# Altium PCB Switching_PCb.PcbDoc
Units mm, origin at the board's own origin, x right, y up, seen from the top; angles counter-clockwise.
Board outline 82.44 x 84.62 mm, 2 copper layers (Top Layer, Bottom Layer); 19 components, 84 nets, 304 pads, 104 vias.
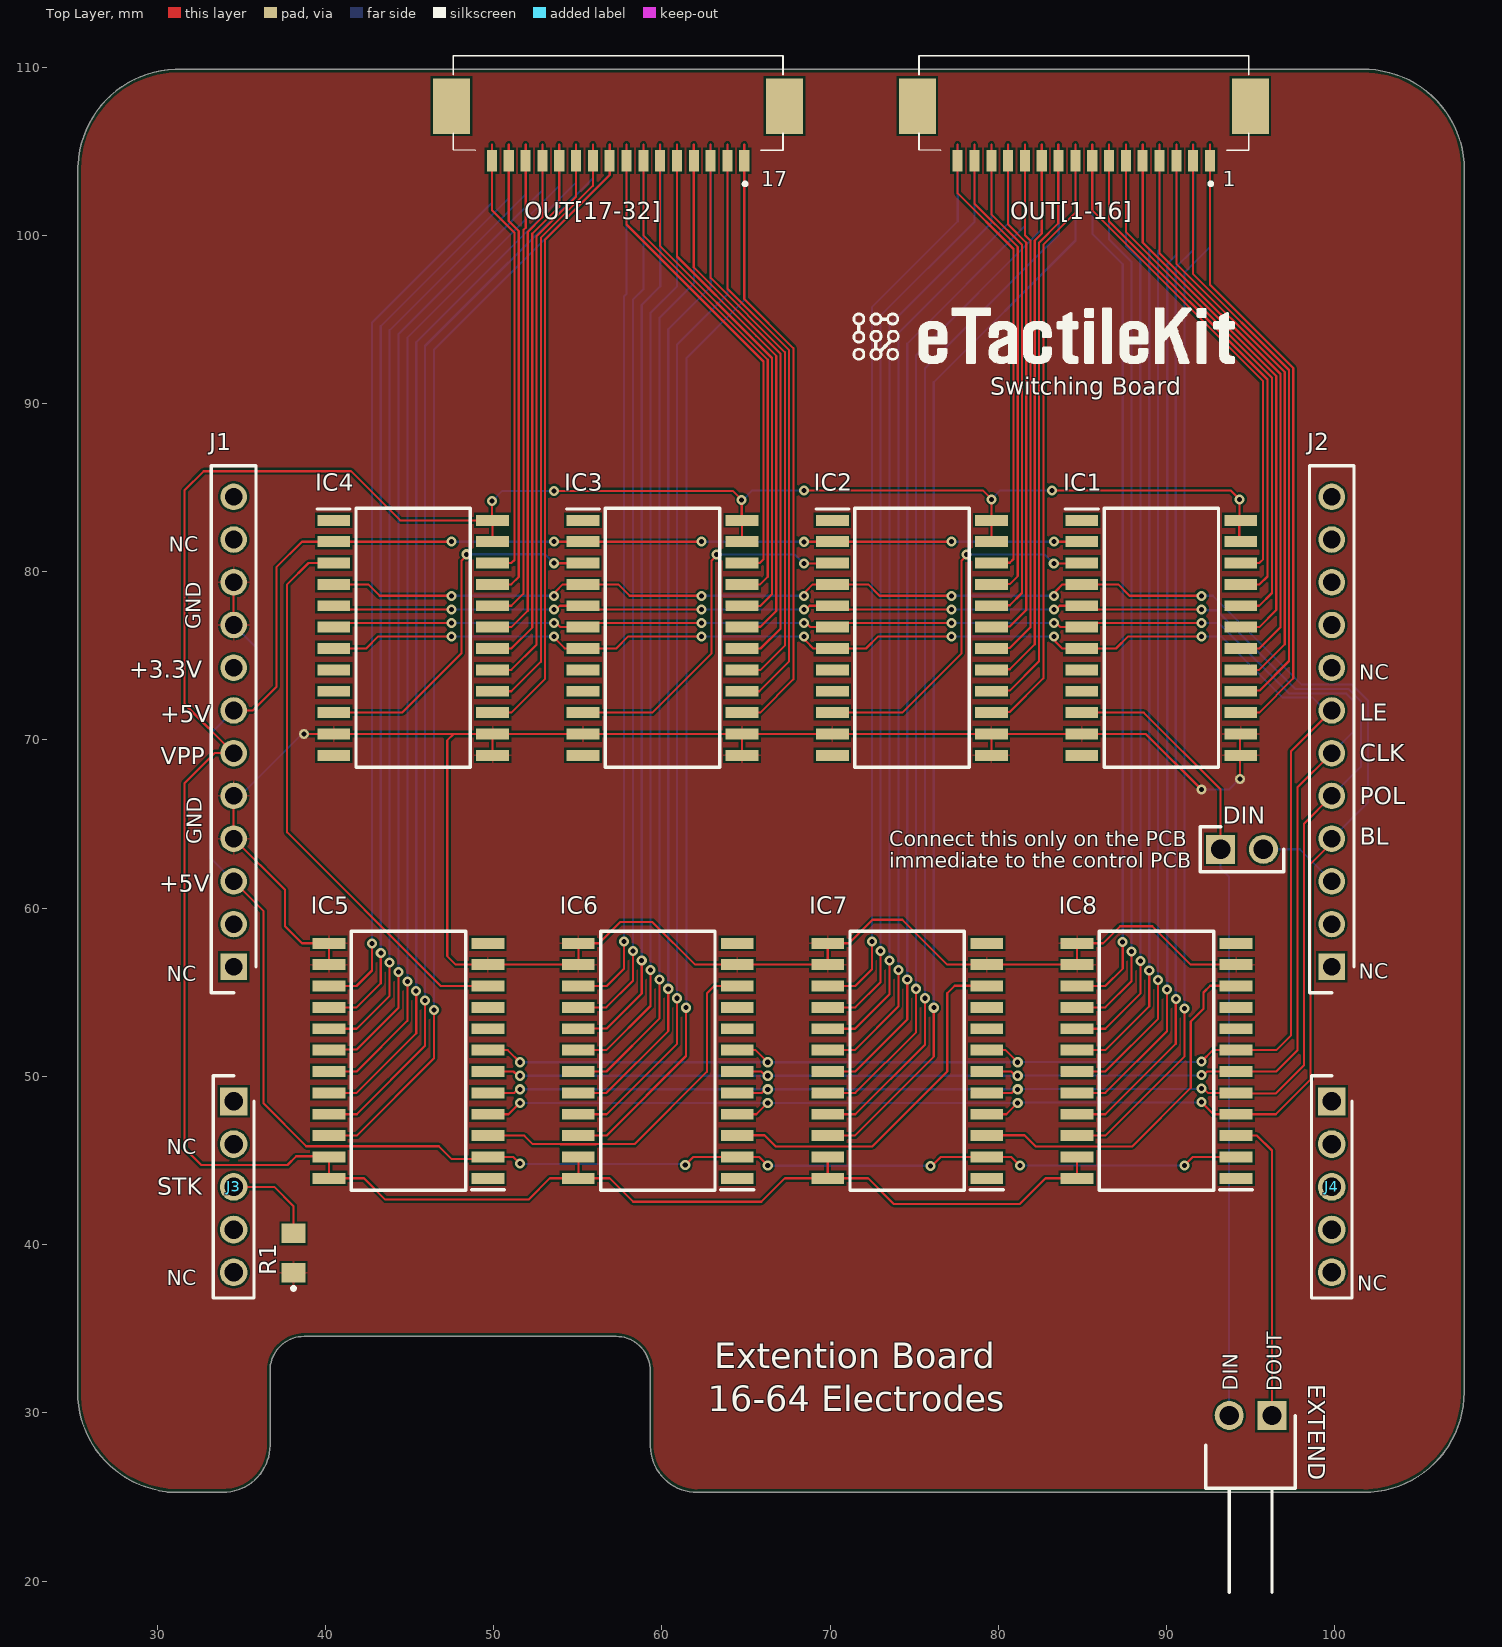
[diagram p0: Top Layer view]
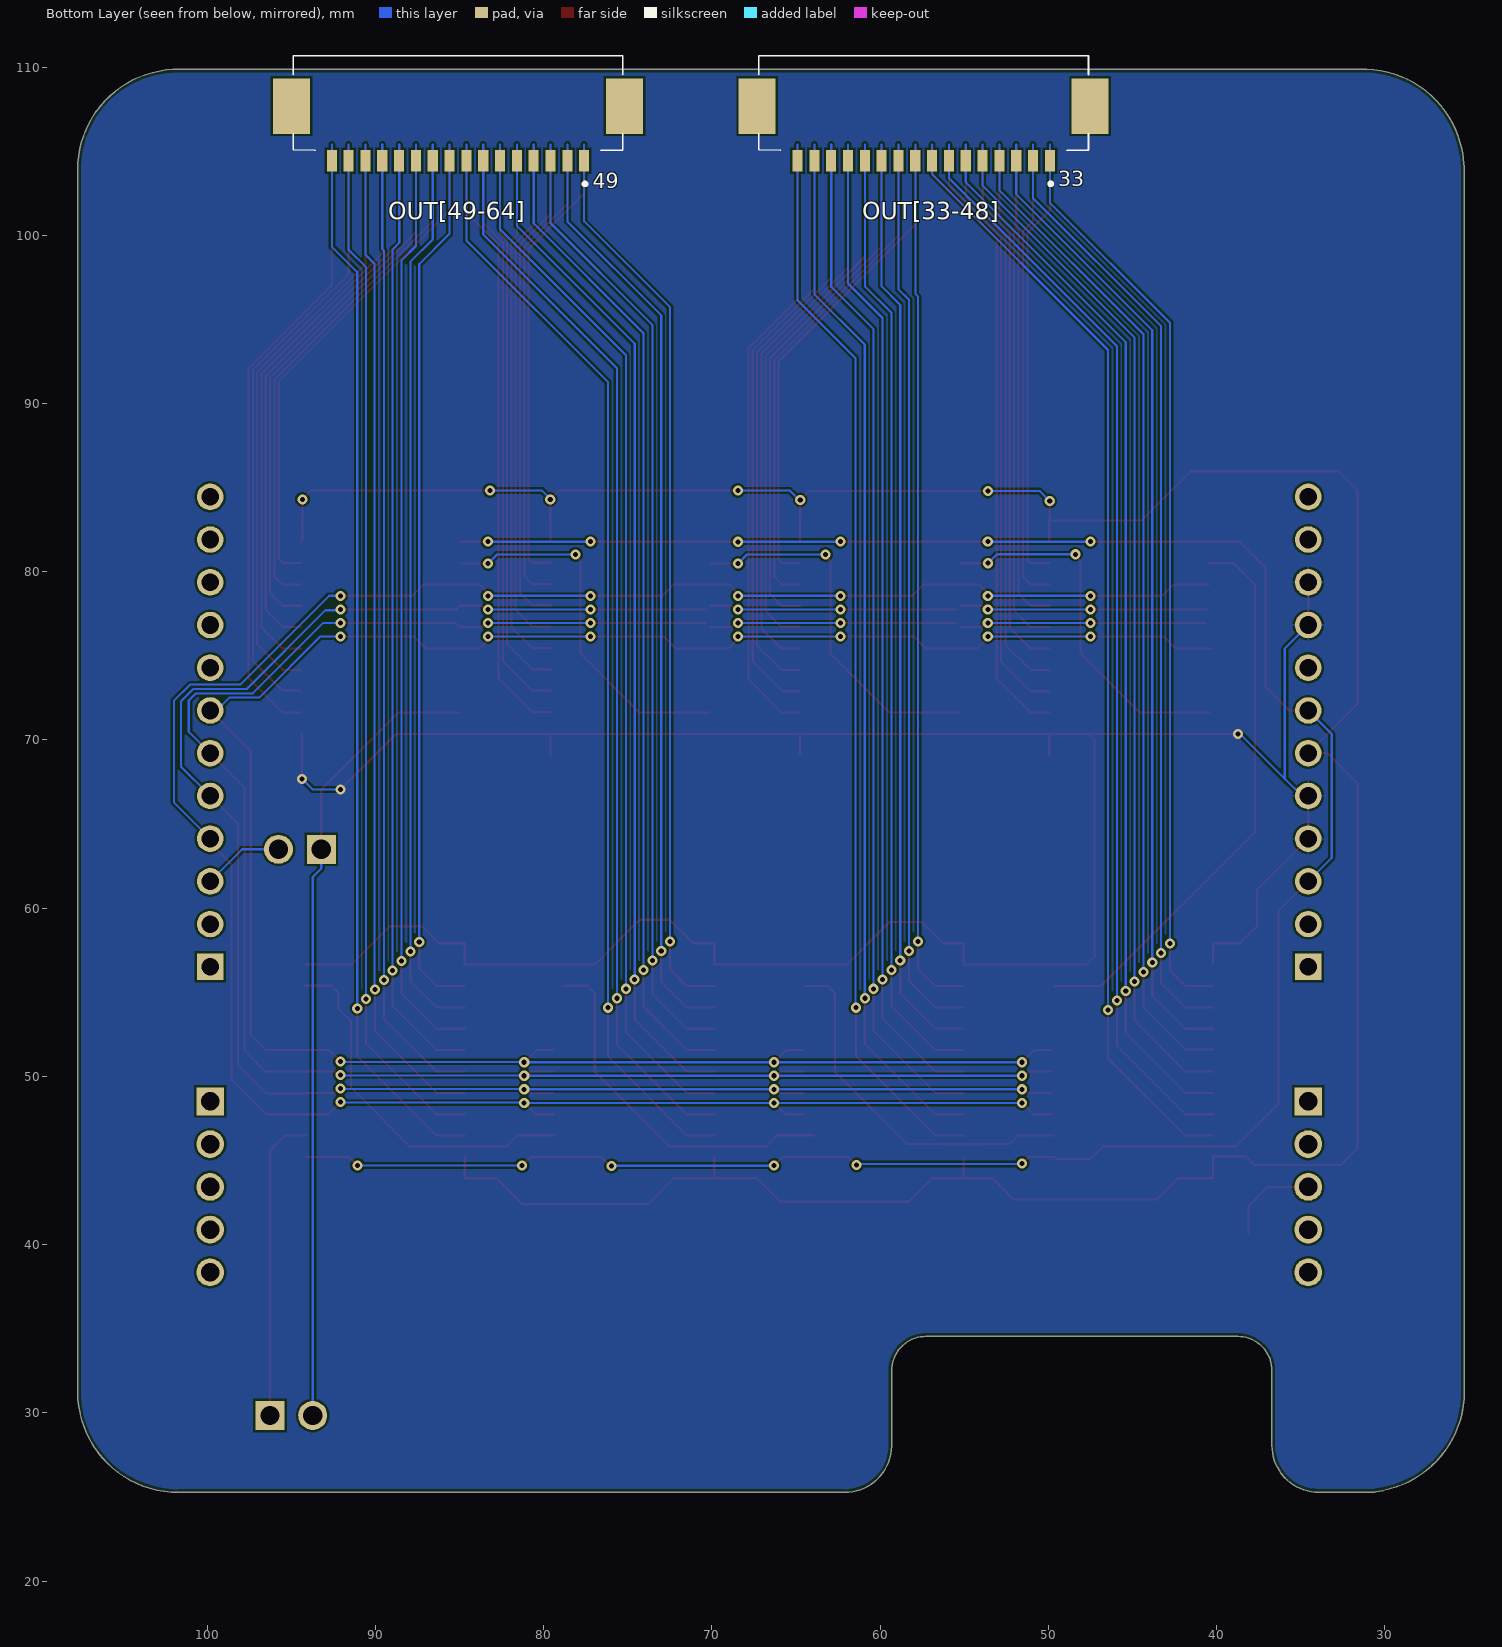
[diagram p1: Bottom Layer view, seen from below]
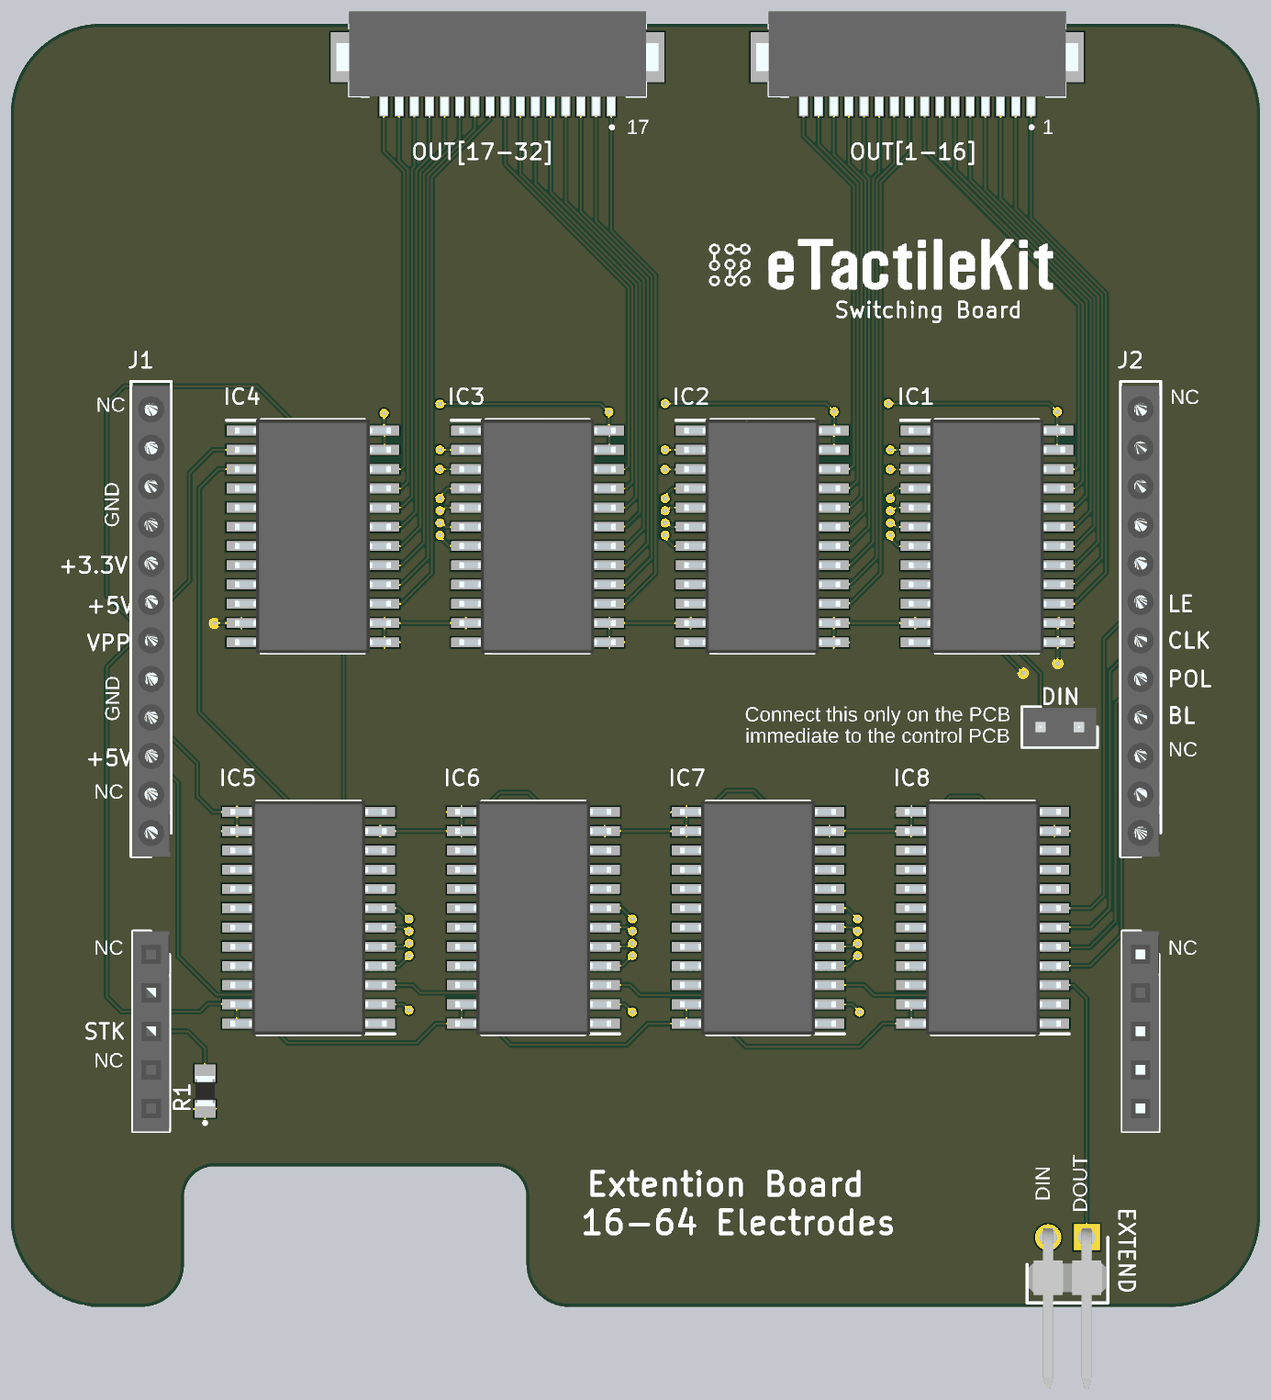
[diagram p2: 3D render of the assembled board from above, using the file's embedded part models]

## Layer stack, top to bottom
Top Solder: solder mask 0.0102, Solder Resist, Dk 3.5
Top Layer: signal copper 0.0356
Dielectric 1: dielectric 0.32, FR-4, Dk 4.8
Bottom Layer: signal copper 0.0356
Bottom Solder: solder mask 0.0102, Solder Resist, Dk 3.5

## Board outline
30.607,25.273 33.909,25.273 ccw(c33.909,28.067) 36.703,28.067 36.703,32.512 cw(c38.735,32.512) 38.735,34.544 57.277,34.544 cw(c57.277,32.512) 59.309,32.512 59.309,28.067 59.316,28.023 ccw(c62.111,28.059) 62.111,25.265 62.154,25.273 101.676,25.273 101.719,25.265 ccw(c101.719,31.242) 107.696,31.241 107.696,31.242 107.696,103.857 107.703,103.899 ccw(c101.726,103.899) 102.034,109.868 101.981,109.88 92.332,109.88 92.312,109.881 31.098,109.881 31.063,109.876 ccw(c31.264,103.903) 25.295,104.213 25.273,104.14 25.273,31.293 25.265,31.25 ccw(c31.242,31.25)

## Design rules (kind name [scope] priority, off if disabled: settings)
BoardOutlineClearance [All] p1: gap=0.2 ignorepadtopadclearanceinfootprint=FALSE
Clearance [All] p1: gap=0.127 ignorepadtopadclearanceinfootprint=FALSE except(0.25: Arc-Hole Track-Hole SMDPad-Hole THPad-Hole Via-Hole Fill-Hole Poly-Hole Region-Hole Text-Hole)
ComponentClearance [All] p1: gap=0.127 collisioncheckmode=3 verticalgap=0.127 showdistances=TRUE
DiffPairsRouting [All] p1: maxlimit=0.254 minlimit=0.127 mostfreqgap=0.127 toplayer_minwidth=0.127 toplayer_maxwidth=25.4 toplayer_prefwidth=0.127 bottomlayer_minwidth=0.127 bottomlayer_maxwidth=25.4 bottomlayer_prefwidth=0.127 maxuncoupledlength=12.7
Height [All] p1: minheight=0 maxheight=1816.048 prefheight=12.7
HoleSize [All] p1: absolutevalues=TRUE maxlimit=6.3 minlimit=0.3 maxpercent=80.000 minpercent=20.000
HoleToHoleClearance [All] p1: gap=0.25 allowstackedmicrovias=FALSE
MinimumAnnularRing [All] p1: minimumring=0.076
MinimumSolderMaskSliver [All] p1: minsoldermaskwidth=0
PlaneClearance [All] p1: clearance=0.127
PlaneConnect PlaneConnectPowerPads [InPadClass('PowerPads')] p1: planeconnectstyle=Direct reliefexpansion=0.508 reliefentries=4 reliefconductorwidth=0.254 reliefairgap=0.254
PlaneConnect [All] p2: pad.planeconnectstyle=Relief pad.reliefexpansion=0.3 pad.reliefentries=4 pad.reliefconductorwidth=0.127 pad.reliefairgap=0.127 via.planeconnectstyle=Direct via.reliefexpansion=0.3 via.reliefentries=4 via.reliefconductorwidth=0.127 via.reliefairgap=0.127
PolygonConnect PolygonConnectPowerPads [All vs (InPadClass('PowerPads'))] p1: connectstyle=Direct reliefconductorwidth=0.254 reliefentries=4 polygonreliefangle="90 Angle" airgapwidth=0.254
PolygonConnect [All] p2: thpad.connectstyle=Relief thpad.reliefconductorwidth=0.127 thpad.reliefentries=4 thpad.polygonreliefangle="90 Angle" thpad.airgapwidth=0.127 smdpad.connectstyle=Relief smdpad.reliefconductorwidth=0.127 smdpad.reliefentries=4 smdpad.polygonreliefangle="90 Angle" smdpad.airgapwidth=0.127 via.connectstyle=Direct via.reliefconductorwidth=0.127 via.reliefentries=4 via.polygonreliefangle="90 Angle" via.airgapwidth=0.127
RoutingVias [All] p1: holewidth=0.3 width=0.6 viastyle="Through Hole" minholewidth=0.3 minwidth=0.6 maxholewidth=0.6 maxwidth=6.6
SilkToSilkClearance [All] p1: silktosilkclearance=0
SilkToSolderMaskClearance [IsPad] p1: minsilkscreentomaskgap=0.127 clearancetoexposedcopper=TRUE
SolderMaskExpansion [All] p1: expansion=0.075 istentingtop=FALSE
Width [All] p1: maxlimit=25.4 minlimit=0.127 preferedwidth=0.127 minimp=50.000000 maximp=50.000000 favimp=50.000000
20 further rules are at their usual default settings.

## Classes and differential pairs
component class Sheet7: J1 J2 J3 J4 OUT[1-16] OUT[17-32] OUT[33-48] OUT[49-64] R1
component class Sheet6: DIN EXTEND IC1 IC2 IC3 IC4 IC5 IC6 IC7 IC8
net class OUT[64..1]: OUT1 OUT2 OUT3 OUT4 OUT5 OUT6 OUT7 OUT8 OUT9 OUT10 OUT11 OUT12 OUT13 OUT14 OUT15 OUT16 OUT17 OUT18 OUT19 OUT20 OUT21 OUT22 OUT23 OUT24 OUT25 OUT26 OUT27 OUT28 OUT29 OUT30 OUT31 OUT32 OUT33 OUT34 OUT35 OUT36 OUT37 OUT38 OUT39 OUT40 OUT41 OUT42 OUT43 OUT44 OUT45 OUT46 OUT47 OUT48 OUT49 OUT50 OUT51 OUT52 OUT53 OUT54 OUT55 OUT56 OUT57 OUT58 OUT59 OUT60 OUT61 OUT62 OUT63 OUT64

## Components (designator, comment, footprint, x,y, rotation, side; value= is the part's Value field where it differs from the comment)
DIN "67996-100HLF" HDRV2W67P254_2X1_254X483X858P 93.218,63.5 r270 top
EXTEND "22-28-8024" HDRRA2W66P0X254_1X2_508X229X274P 96.266,29.845 r180 top
IC1 "HV513WG-G" SOIC127P1030X265-24N 89.688,76.073 r0 top
IC2 "HV513WG-G" SOIC127P1030X265-24N 74.863,76.073 r0 top
IC3 "HV513WG-G" SOIC127P1030X265-24N 60.037,76.073 r0 top
IC4 "HV513WG-G" SOIC127P1030X265-24N 45.212,76.073 r0 top
IC5 "HV513WG-G" SOIC127P1030X265-24N 44.933,50.927 r180 top
IC6 "HV513WG-G" SOIC127P1030X265-24N 59.758,50.927 r180 top
IC7 "HV513WG-G" SOIC127P1030X265-24N 74.584,50.927 r180 top
IC8 "HV513WG-G" SOIC127P1030X265-24N 89.409,50.927 r180 top
J1 "PRT-14322" RHDR12W87P0X254_1X12_3103X250X865P 34.544,56.515 r90 top
J2 "PRT-14322" RHDR12W87P0X254_1X12_3103X250X865P 99.822,56.515 r90 top
J3 "SSQ-105-01-S-S" RHDR5W64P254_1X5_1321X241X851P 34.544,48.514 r90 top
J4 "SSQ-105-01-S-S" RHDR5W64P254_1X5_1321X241X851P 99.822,48.514 r90 top
OUT[1-16] "FH12-16S-1SH_55_" FH1216S1SH55 85.083,107.56 r180 top
OUT[17-32] "FH12-16S-1SH_55_" FH1216S1SH55 57.397,107.56 r180 top
OUT[33-48] "FH12-16S-1SH_55_" FH1216S1SH55 57.404,107.56 r0 bottom
OUT[49-64] "FH12-16S-1SH_55_" FH1216S1SH55 85.09,107.56 r0 bottom
R1 "ERJ-P06F5103V" ERJP06D1000V 38.1,39.497 r90 top

## Footprints (in the part's own frame and the unit in brackets; to place one, negate y for a bottom-side part, rotate by r counter-clockwise, add the part's x,y. Pads: shape width x height; smd on the part's side, far side on the other; paste and mask are expansions set on the pad)
ERJP06D1000V [mm]
  rect 1.15x1.4 smd: 1(-1.175,0) 2(1.175,0)
  silkscreen extent -2.2,-0.1 -2,0.1, body extent -1,-0.63 1,0.63, height 0.6
FH1216S1SH55 [mm]
  rect 0.6x1.3 smd: 1(-7.5,3.125) 2(-6.5,3.125) 3(-5.5,3.125) 4(-4.5,3.125) 5(-3.5,3.125) 6(-2.5,3.125) 7(-1.5,3.125) 8(-0.5,3.125) 9(0.5,3.125) 10(1.5,3.125) 11(2.5,3.125) 12(3.5,3.125) 13(4.5,3.125) 14(5.5,3.125) 15(6.5,3.125) 16(7.5,3.125)
  rect 2.2x3.3 smd: MP1(-9.9,-0.125) MP2(9.9,-0.125)
  silkscreen extent -9.8,-3.13 9.8,4.55, body extent -10.62,-3.13 10.62,3.71, height 2.3
HDRRA2W66P0X254_1X2_508X229X274P [mm]
  rect 1.725x1.725 hole 1.15: 1(0,0)
  round 1.725 hole 1.15: 2(2.54,0)
  silkscreen extent -1.4,0 3.94,10.52, body extent -1.27,-0.59 3.81,10, height 2.37
HDRV2W67P254_2X1_254X483X858P [mm]
  rect 1.725x1.725 / inner round 1.725 / far side rect 1.725x1.725 hole 1.15: 1(0,0)
  round 1.725 hole 1.15: 2(0,2.54)
  silkscreen extent -1.34,-1.21 1.34,3.75, body extent -1.27,-1.14 1.27,3.68, height 8.58
RHDR5W64P254_1X5_1321X241X851P [mm]
  rect 1.65x1.65 / inner round 1.65 / far side rect 1.65x1.65 hole 1.1: 1(0,0)
  round 1.65 hole 1.1: 2(-2.54,0) 3(-5.08,0) 4(-7.62,0) 5(-10.16,0)
  silkscreen extent -11.69,-1.2 1.53,1.2, body extent -11.69,-1.2 1.53,1.2, height 8.51
RHDR12W87P0X254_1X12_3103X250X865P [mm]
  rect 1.575x1.575 / inner round 1.575 / far side rect 1.575x1.575 hole 1.05: 1(0,0)
  round 1.575 hole 1.05: 2(2.54,0) 3(5.08,0) 4(7.62,0) 5(10.16,0) 6(12.7,0) 7(15.24,0) 8(17.78,0) 9(20.32,0) 10(22.86,0) 11(25.4,0) 12(27.94,0)
  silkscreen extent -1.55,-1.33 29.79,1.33, body extent -1.55,-1.25 29.49,1.25, height 8.65
SOIC127P1030X265-24N [mm]
  rect 1.95x0.65 smd: 1(-4.725,6.985) 2(-4.725,5.715) 3(-4.725,4.445) 4(-4.725,3.175) 5(-4.725,1.905) 6(-4.725,0.635) 7(-4.725,-0.635) 8(-4.725,-1.905) 9(-4.725,-3.175) 10(-4.725,-4.445) 11(-4.725,-5.715) 12(-4.725,-6.985) 13(4.725,-6.985) 14(4.725,-5.715) 15(4.725,-4.445) 16(4.725,-3.175) 17(4.725,-1.905) 18(4.725,-0.635) 19(4.725,0.635) 20(4.725,1.905) 21(4.725,3.175) 22(4.725,4.445) 23(4.725,5.715) 24(4.725,6.985)
  silkscreen extent -5.7,-7.7 3.4,7.7, body extent -5.15,-7.7 5.15,7.7, height 2.65

## Part data
DIN: "BergStik<sup>&reg;</sup>, Board to Board connector, Unshrouded vertical header, Through Hole, Double Row, 0 Positions, 2.54 mm (0.100in) Pitch", Manufacturer_Name="Amphenol Communications Solutions", Datasheet Link=https://cdn.amphenol-cs.com/media/wysiwyg/files/drawing/67996.pdf, Geometry.Height=8.58mm, Manufacturer_Part_Number=67996-100HLF
EXTEND: "Connector", Manufacturer_Name=Molex, Datasheet Link=https://www.molex.com/pdm_docs/sd/022288024_sd.pdf, Height=2.74mm, Manufacturer_Part_Number=22-28-8024
IC1 IC2 IC3 IC4 IC5 IC6 IC7 IC8: "Integrated Circuit", Manufacturer_Name=Microchip, Mouser Part Number=689-HV513WG-G, Arrow Part Number=HV513WG-G, Arrow Price/Stock=https://www.arrow.com/en/products/hv513wg-g/microchip-technology?region=nac, Datasheet Link=http://ww1.microchip.com/downloads/en/DeviceDoc/20005846A.pdf, Height=2.65mm, Manufacturer_Part_Number=HV513WG-G, Mouser Price/Stock=https://www.mouser.co.uk/ProductDetail/Microchip-Technology/HV513WG-G?qs=wSTxOR59s%2FzutPVpK8md7g%3D%3D
J1 J2: "SparkFun Accessories Photon Stackable Header- 12 Pin", Manufacturer_Name=SparkFun, Mouser Part Number=474-PRT-14322, Datasheet Link=https://cdn.sparkfun.com/datasheets/Prototyping/SP-140520-XX-001.pdf, Geometry.Height=8.65mm, Manufacturer_Part_Number=PRT-14322, Mouser Price/Stock=https://www.mouser.co.uk/ProductDetail/SparkFun/PRT-14322?qs=YCa%2FAAYMW006l9RrtPHkxQ%3D%3D
J3 J4: "5 Position, .100&quot; Tiger Buy&trade; Socket Strip, Square Tail, Single Row", Manufacturer_Name=SAMTEC, Mouser Part Number=200-SSQ10501SS, Datasheet Link=http://suddendocs.samtec.com/prints/ssq-1xx-xx-xxx-x-xx-xxx-xx-x-mkt.pdf, Geometry.Height=8.51mm, Manufacturer_Part_Number=SSQ-105-01-S-S, Mouser Price/Stock=https://www.mouser.co.uk/ProductDetail/Samtec/SSQ-105-01-S-S?qs=rU5fayqh%252BE15SmaD0WxGBw%3D%3D
OUT[1-16] OUT[17-32] OUT[33-48] OUT[49-64]: "Connector", Arrow Part Number=FH12-16S-1SH(55), Manufacturer_Name=Hirose, Mouser Part Number=798-FH12-16S-1SH55, Arrow Price/Stock=https://www.arrow.com/en/products/fh12-16s-1sh-55/hirose-electric, Datasheet Link=https://datasheet.datasheetarchive.com/originals/distributors/SFDatasheet-1/sf-00023459.pdf, Height=2.2mm, Manufacturer_Part_Number=FH12-16S-1SH(55), Mouser Price/Stock=https://www.mouser.co.uk/ProductDetail/Hirose-Connector/FH12-16S-1SH55?qs=Ux3WWAnHpjBc3pYMMfcXYg%3D%3D
R1: "Resistor", Manufacturer_Name=Panasonic, Mouser Part Number=667-ERJ-P06F5103V, Datasheet Link=http://industrial.panasonic.com/cdbs/www-data/pdf/RDA0000/AOA0000C102.pdf, Height=0.7mm, Manufacturer_Part_Number=ERJ-P06F5103V, Mouser Price/Stock=https://www.mouser.co.uk/ProductDetail/Panasonic/ERJ-P06F5103V?qs=iIVTEDlrHA2ZP3yozH4uHg%3D%3D

## Via types
v1: diameter 0.6, hole 0.3, Top Layer to Bottom Layer, 104 vias

## Nets (pads, with @x,y where several pads share a name; then routed paths per layer and width w, separated by ;. In a path a pad name is that pad's centre, name@x,y a point inside that pad or via, vN(x,y) a via of type N, cw(c..) or ccw(c..) an arc to the next point about the centre after c; other vN are vias at no path point)
+3V3: J1.8
+5V: IC1.2 IC2.2 IC3.2 IC4.2 IC5.2 IC6.2 IC7.2 IC8.2 J1.3 J1.7 | length 144.5
  Top Layer w0.127: J1.3 36.322,59.817 36.322,48.387 38.862,45.847 46.736,45.847 47.498,45.085 49.531,45.085 IC5.2 51.16,45.212 51.541,44.831 v1(51.562,44.831) ; J1.7 35.687,71.755 37.084,73.152 37.084,80.264 38.608,81.788 IC4.2 v1(47.498,81.788) ; v1(53.594,81.788) IC3.2 v1(62.357,81.788) ; v1(61.389,44.735) 61.867,45.212 65.786,45.212 v1(66.294,44.704) ; v1(68.451,81.782) 70.132,81.782 IC2.2 v1(77.216,81.788) ; v1(75.961,44.676) 76.045,44.676 76.581,45.212 80.772,45.212 v1(81.28,44.704) ; v1(83.312,81.788) IC1.2 ; v1(91.059,44.704) 91.567,45.212 IC8.2
  Bottom Layer w0.127: J1.3 33.147,62.992 33.147,70.358 J1.7 ; v1(47.498,81.788) v1(53.594,81.788) ; v1(51.562,44.831) 51.61,44.783 61.341,44.783 v1(61.389,44.735) ; v1(62.357,81.788) 68.445,81.788 v1(68.451,81.782) ; v1(66.294,44.704) 66.308,44.69 75.947,44.69 v1(75.961,44.676) ; v1(77.216,81.788) v1(83.312,81.788) ; v1(81.28,44.704) v1(91.059,44.704)
BL: IC1.4 IC2.4 IC3.4 IC4.4 IC5.4 IC6.4 IC7.4 IC8.4 J2.4 | length 143.9
  Top Layer w0.127: IC4.4 42.545,79.248 43.222,78.571 v1(47.498,78.571) ; IC5.4@49.811,47.752 50.885,47.752 v1(51.562,48.429) ; v1@53.685,78.831 54.102,79.248 57.404,79.248 58.081,78.571 v1(62.357,78.571) ; IC6.4@64.543,47.752 65.617,47.752 v1(66.294,48.429) ; v1@68.544,78.831 68.961,79.248 72.263,79.248 72.94,78.571 v1(77.216,78.571) ; IC7.4@79.402,47.752 80.476,47.752 v1(81.153,48.429) ; v1(83.312,78.571) 83.403,78.661 83.403,78.831 83.82,79.248 87.122,79.248 87.799,78.571 v1(92.075,78.571) ; v1(92.075,48.472) 92.795,47.752 IC8.4 96.498,47.752 98.552,49.806 98.552,62.611 99.822,63.881 J2.4
  Bottom Layer w0.127: v1(47.498,78.571) v1(53.594,78.571) ; v1(51.562,48.429) v1(66.294,48.429) v1(81.153,48.429) 81.174,48.451 92.054,48.451 v1(92.075,48.472) ; v1(62.357,78.571) v1(68.453,78.571) ; v1(77.216,78.571) v1(83.312,78.571) ; v1(92.075,78.571) 92.752,78.571 98.034,73.289 101.022,73.289 101.981,72.33 101.981,66.294 J2.4
CLK: IC1.6 IC2.6 IC3.6 IC4.6 IC5.6 IC6.6 IC7.6 IC8.6 J2.6 | length 136.4
  Top Layer w0.127: IC4.6@40.64,76.962 v1(47.498,76.962) ; IC5.6@49.811,50.292 51.18,50.292 v1@51.434,50.038 ; v1@53.722,76.962 53.976,76.708 IC3.6@55.245,76.708 ; IC3.6@55.499,76.962 v1(62.357,76.962) ; IC6.6@64.543,50.292 65.912,50.292 v1@66.166,50.038 ; v1@68.581,76.962 68.835,76.708 IC2.6@70.104,76.708 ; IC2.6@70.358,76.962 v1(77.216,76.962) ; IC7.6@79.402,50.292 80.771,50.292 81.025,50.038 v1(81.153,50.038) ; v1(83.312,76.962) 83.44,76.962 83.694,76.708 IC1.6 85.217,76.962 v1(92.075,76.962) ; v1(92.075,50.08) 92.203,50.08 92.415,50.292 IC8.6 96.52,50.292 97.79,51.562 97.79,67.183 J2.6
  Bottom Layer w0.127: v1(47.498,76.962) v1(53.594,76.962) ; v1(51.562,50.038) v1(66.294,50.038) v1(81.153,50.038) 81.174,50.059 92.054,50.059 v1(92.075,50.08) ; v1(62.357,76.962) v1(68.453,76.962) ; v1(77.216,76.962) v1(83.312,76.962) ; v1(92.075,76.962) 93.091,76.962 97.282,72.771 98.806,72.771 98.797,72.762 100.675,72.762 101.092,72.345 101.092,70.485 J2.6
DIN: DIN.2 J2.3 | length 4.9
  Bottom Layer w0.127: DIN.2 97.917,63.5 J2.3
DIN_1: DIN.1 EXTEND.2 IC1.10 | length 47.6
  Top Layer w0.127: IC1.10 88.646,71.628 93.218,67.056 DIN.1
  Bottom Layer w0.127: DIN.1 93.218,62.357 93.722,61.853 EXTEND.2@93.722,29.849
DOUT: J2.10
DOUT1: IC2.3 IC3.10 | length 22.1
  Top Layer w0.127: IC3.10@55.279,71.628 59.436,71.628 62.943,75.135 62.943,80.635 v1@63.246,80.939 ; v1(68.438,80.495) IC2.3@70.081,80.495
  Bottom Layer w0.127: v1(63.246,81.026) 67.908,81.026 v1(68.438,80.495)
DOUT2: IC4.3 IC5.10 | length 33.8
  Top Layer w0.127: IC4.3 38.989,80.518 37.719,79.248 37.719,64.516 46.863,55.372 IC5.10
DOUT3: IC6.3 IC7.10 | length 21.8
  Top Layer w0.127: IC6.3@63.944,46.499 66.102,46.499 66.766,45.834 72.504,45.834 76.962,50.292 76.962,54.946 77.405,55.389 IC7.10@78.769,55.389
DOUT4: EXTEND.1 IC8.3 | length 18.2
  Top Layer w0.127: IC8.3 95.377,46.482 96.266,45.593 EXTEND.1
GND: IC1.11 IC1.13 IC1.14 IC2.11 IC2.13 IC2.14 IC3.11 IC3.13 IC3.14 IC4.11 IC4.13 IC4.14 IC5.11 IC5.13 IC5.14 IC6.11 IC6.13 IC6.14 IC7.11 IC7.13 IC7.14 IC8.11 IC8.13 IC8.14 J1.4 J1.5 J1.9 J1.10 R1.1 | length 164
  Top Layer w0.127: J1.5 J1.4 37.592,61.087 37.592,58.928 38.608,57.912 IC5.13 IC5.14 ; J1.9 J1.10 ; v1(38.716,70.345) 38.728,70.358 IC4.11 47.625,70.358 ; IC4.13 IC4.14 ; IC3.13 IC3.14 ; IC2.13 IC2.14 ; v1(92.075,67.056) 88.773,70.358 IC1.11 IC2.14 ; IC8.11 91.44,56.642 89.154,58.928 87.249,58.928 86.233,57.912 IC8.13 IC8.14 IC7.11 76.962,56.642 74.295,59.309 72.517,59.309 71.12,57.912 IC7.13 IC7.14 IC6.11 61.976,56.642 59.436,59.182 57.531,59.182 56.261,57.912 IC6.13 IC6.14 IC5.11 47.752,56.642 47.244,57.15 47.244,69.977 47.625,70.358 ; v1(94.361,67.691) 94.361,69.036 IC1.13 94.366,69.135 94.366,70.311 IC1.14 ; 47.625,70.358 IC4.14 ; IC4.14 IC3.11 IC3.14 ; IC3.14 IC2.11 IC2.14
  Bottom Layer w0.127: J1.5 34.917,66.675 35.941,67.699 ; J1.9 35.941,75.438 35.941,67.699 ; v1(38.716,70.345) 38.588,70.345 35.941,67.699 ; v1(92.075,67.056) 93.726,67.056 v1(94.361,67.691)
LE: IC1.7 IC2.7 IC3.7 IC4.7 IC5.7 IC6.7 IC7.7 IC8.7 J2.7 | length 136.7
  Top Layer w0.127: IC4.7@40.259,75.438 IC4.7 42.418,75.438 43.138,76.158 v1(47.498,76.158) ; IC5.7@49.811,51.562 50.842,51.562 v1(51.562,50.842) ; v1(53.594,76.158) 53.594,76.073 54.221,75.446 55.305,75.446 IC3.7 57.277,75.438 57.997,76.158 v1(62.357,76.158) ; IC6.7@64.543,51.562 65.574,51.562 v1(66.294,50.842) ; v1(68.453,76.158) 68.544,76.067 68.544,75.896 69.002,75.438 IC2.7 72.136,75.438 72.856,76.158 v1(77.216,76.158) ; IC7.7@79.402,51.562 80.433,51.562 v1(81.153,50.842) ; v1(83.312,76.158) 83.403,76.067 83.403,75.831 83.796,75.438 86.995,75.438 87.715,76.158 v1(92.075,76.158) ; v1(92.075,50.885) 92.752,51.562 IC8.7 96.52,51.562 97.409,52.451 97.409,69.342 J2.7
  Bottom Layer w0.127: v1(47.498,76.158) v1(53.594,76.158) ; v1(51.562,50.842) v1(66.294,50.842) v1(81.153,50.842) 81.174,50.863 92.054,50.863 v1(92.075,50.885) ; v1(62.357,76.158) v1(68.453,76.158) ; v1(77.216,76.158) v1(83.312,76.158) ; v1(92.075,76.158) 93.26,76.158 96.901,72.517 98.683,72.517 99.445,71.755 J2.7 J2.7@99.807,71.74
NetIC1_3: IC1.3 IC2.10 | length 22.2
  Top Layer w0.127: IC2.10 74.295,71.628 77.802,75.135 77.802,80.635 78.105,80.939 v1(78.105,81.026) ; v1(83.297,80.495) 84.94,80.495 IC1.3
  Bottom Layer w0.127: v1(78.105,81.026) 82.767,81.026 v1(83.297,80.495)
NetIC3_3: IC3.3 IC4.10 | length 22.1
  Top Layer w0.127: IC4.10@40.421,71.641 44.578,71.641 48.085,75.148 48.085,80.648 v1@48.388,80.951 ; v1(53.581,80.508) IC3.3@55.224,80.508
  Bottom Layer w0.127: v1(48.388,81.039) 53.05,81.039 v1(53.581,80.508)
NetIC5_3: IC5.3 IC6.10 | length 21.7
  Top Layer w0.127: IC5.3 51.816,46.482 52.324,45.974 53.972,45.974 53.979,45.966 56.087,45.966 56.095,45.974 58.375,45.974 62.676,50.275 62.676,54.929 63.119,55.372 IC6.10
NetIC7_3: IC7.3 IC8.10 | length 21.9
  Top Layer w0.127: IC7.3@79.397,46.499 81.555,46.499 82.219,45.834 87.957,45.834 91.44,49.317 91.44,53.266 92.202,54.028 92.202,54.991 92.6,55.389 IC8.10@94.222,55.389
NetJ3_3: J3.3 R1.2 | length 6
  Top Layer w0.127: J3.3@34.29,43.688 J3.3 36.957,43.434 38.1,42.291 R1.2
OUT1: IC1.15 OUT[1-16].1 | length 37.8
  Top Layer w0.127: 92.583,105.41 92.583,97.066 97.536,92.113 97.536,73.66 95.504,71.628 IC1.15
OUT2: IC1.16 OUT[1-16].2 | length 36.7
  Top Layer w0.127: 91.583,105.41 91.583,97.691 97.282,91.992 97.282,74.693 95.525,72.936 94.451,72.936 IC1.16
OUT3: IC1.17 OUT[1-16].3 | length 35.6
  Top Layer w0.127: 90.583,105.41 90.583,98.318 97.028,91.873 97.028,75.692 95.504,74.168 IC1.17
OUT4: IC1.18 OUT[1-16].4 | length 34.6
  Top Layer w0.127: 89.583,105.41 89.583,98.944 96.774,91.753 96.774,76.708 95.504,75.438 IC1.18
OUT5: IC1.19 OUT[1-16].5 | length 33.5
  Top Layer w0.127: 88.583,105.41 88.583,99.576 96.52,91.639 96.52,77.724 95.504,76.708 IC1.19
OUT6: IC1.20 OUT[1-16].6 | length 32.4
  Top Layer w0.127: 87.583,105.41 87.583,100.211 96.266,91.528 96.266,78.74 95.504,77.978 IC1.20
OUT7: IC1.21 OUT[1-16].7 | length 31.4
  Top Layer w0.127: 86.583,105.41 86.583,100.843 95.999,91.426 95.999,79.719 95.528,79.248 IC1.21
OUT8: IC1.22 OUT[1-16].8 | length 30.3
  Top Layer w0.127: 85.583,105.41 85.583,101.483 95.745,91.321 95.745,80.753 95.51,80.518 IC1.22
OUT9: IC2.15 OUT[1-16].9 | length 36.5
  Top Layer w0.127: IC2.15 79.621,71.662 80.679,71.662 82.677,73.66 82.677,99.441 84.582,101.346 84.582,101.6 84.583,101.601 84.583,105.41
OUT10: IC2.16 OUT[1-16].10 | length 34.8
  Top Layer w0.127: IC2.16 79.621,72.932 80.679,72.932 82.423,74.676 82.423,99.568 83.566,100.711 83.566,105.393 83.583,105.41
OUT11: IC2.17 OUT[1-16].11 | length 33.1
  Top Layer w0.127: IC2.17 79.621,74.202 80.679,74.202 82.169,75.692 82.169,99.695 82.583,100.109 82.583,105.41
OUT12: IC2.18 OUT[1-16].12 | length 31.7
  Top Layer w0.127: IC2.18 79.621,75.472 80.679,75.472 81.915,76.708 81.915,99.68 81.583,100.012 81.583,105.41
OUT13: IC2.19 OUT[1-16].13 | length 30.6
  Top Layer w0.127: IC2.19 79.621,76.742 80.679,76.742 81.661,77.724 81.661,99.568 80.583,100.646 80.583,105.41
OUT14: IC2.20 OUT[1-16].14 | length 29.6
  Top Layer w0.127: 79.586,105.407 79.586,101.262 81.407,99.441 81.407,78.74 80.679,78.012 79.621,78.012 IC2.20
OUT15: IC2.21 OUT[1-16].15 | length 28.5
  Top Layer w0.127: 78.583,105.41 78.583,103.594 78.583,101.884 81.153,99.314 81.153,79.742 80.679,79.268 79.607,79.268 IC2.21
OUT16: IC2.22 OUT[1-16].16 | length 27.4
  Top Layer w0.127: 77.583,105.41 77.583,102.503 80.899,99.187 80.899,80.757 80.679,80.537 79.607,80.537 IC2.22
OUT17: IC3.15 OUT[17-32].1 | length 36.9
  Top Layer w0.127: IC3.15 64.765,71.625 65.84,71.625 67.818,73.602 67.818,93.292 64.897,96.213 64.897,105.41
OUT18: IC3.16 OUT[17-32].2 | length 35.8
  Top Layer w0.127: 63.897,105.41 63.897,96.834 67.564,93.167 67.564,74.676 65.786,72.898 IC3.16
OUT19: IC3.17 OUT[17-32].3 | length 34.8
  Top Layer w0.127: 62.897,105.41 62.897,97.469 67.31,93.056 67.31,75.607 65.871,74.168 IC3.17
OUT20: IC3.18 OUT[17-32].4 | length 33.7
  Top Layer w0.127: 61.897,105.41 61.897,98.107 67.056,92.948 67.056,76.632 65.862,75.438 IC3.18
OUT21: IC3.19 OUT[17-32].5 | length 32.6
  Top Layer w0.127: 60.897,105.41 60.897,98.742 65.604,94.035 65.604,94.03 66.802,92.832 66.802,77.669 65.864,76.73 64.784,76.73 IC3.19
OUT22: IC3.20 OUT[17-32].6 | length 31.6
  Top Layer w0.127: 59.897,105.41 59.897,99.361 66.546,92.712 66.546,78.659 65.849,77.961 64.779,77.961 IC3.20
OUT23: IC3.21 OUT[17-32].7 | length 30.5
  Top Layer w0.127: 58.897,105.41 58.897,100.002 66.292,92.607 66.292,79.701 65.839,79.248 IC3.21
OUT24: IC3.22 OUT[17-32].8 | length 29.4
  Top Layer w0.127: 57.897,105.41 57.897,100.643 66.038,92.502 66.038,80.748 65.808,80.518 IC3.22
OUT25: IC4.15 OUT[17-32].9 | length 37.3
  Top Layer w0.127: IC4.15 51.054,71.628 53.061,73.635 53.061,99.748 56.897,103.584 56.897,105.41
OUT26: IC4.16 OUT[17-32].10 | length 35.6
  Top Layer w0.127: IC4.16 51.054,72.898 52.806,74.65 52.806,99.853 55.897,102.945 55.897,105.41
OUT27: IC4.17 OUT[17-32].11 | length 34
  Top Layer w0.127: IC4.17 51.054,74.168 52.549,75.663 52.549,99.956 54.897,102.304 54.897,105.41
OUT28: IC4.18 OUT[17-32].12 | length 32.3
  Top Layer w0.127: IC4.18 51.054,75.438 52.293,76.677 52.293,100.091 53.897,101.695 53.897,105.41
OUT29: IC4.19 OUT[17-32].13 | length 30.6
  Top Layer w0.127: IC4.19 51.054,76.708 52.025,77.679 52.025,100.201 52.897,101.072 52.897,105.41
OUT30: IC4.20 OUT[17-32].14 | length 28.9
  Top Layer w0.127: IC4.20 51.054,77.978 51.767,78.691 51.767,100.315 51.903,100.451 51.903,105.404
OUT31: IC4.21 OUT[17-32].15 | length 27.7
  Top Layer w0.127: IC4.21 51.054,79.248 51.494,79.688 51.494,100.258 50.897,100.854 50.897,105.41
OUT32: IC4.22 OUT[17-32].16 | length 26.6
  Top Layer w0.127: 49.897,105.41 49.897,101.487 51.237,100.147 51.237,80.701 51.054,80.518 IC4.22
OUT33: IC5.15 OUT[33-48].1 | length 55
  Top Layer w0.127: IC5.15 41.842,55.372 42.763,56.293 v1(42.763,57.894)
  Bottom Layer w0.127: v1(42.763,57.894) 42.763,94.805 49.904,101.946 49.904,105.41
OUT34: IC5.16 OUT[33-48].2 | length 56.7
  Top Layer w0.127: IC5.16 41.851,54.102 43.289,55.54 v1(43.289,57.331)
  Bottom Layer w0.127: v1(43.289,57.331) 43.289,94.597 50.904,102.212 50.904,105.41
OUT35: IC5.17 OUT[33-48].3 | length 58.4
  Top Layer w0.127: IC5.17 41.855,52.832 43.815,54.792 v1(43.815,56.769)
  Bottom Layer w0.127: v1(43.815,56.769) 43.815,94.361 51.904,102.45 51.904,105.41
OUT36: IC5.18 OUT[33-48].4 | length 60
  Top Layer w0.127: IC5.18 40.25,51.604 41.856,51.604 44.341,54.089 v1(44.341,56.207)
  Bottom Layer w0.127: v1(44.341,56.207) 44.341,94.125 52.904,102.688 52.904,105.41
OUT37: IC5.19 OUT[33-48].5 | length 61.8
  Top Layer w0.127: IC5.19 41.857,50.292 44.867,53.303 v1(44.867,55.644)
  Bottom Layer w0.127: v1(44.867,55.644) 44.867,93.921 53.904,102.957 53.904,105.41
OUT38: IC5.20 OUT[33-48].6 | length 63.4
  Top Layer w0.127: IC5.20 41.855,49.022 45.393,52.56 v1(45.393,55.082)
  Bottom Layer w0.127: v1(45.393,55.082) 45.393,93.653 54.904,103.164 54.904,105.41
OUT39: IC5.21 OUT[33-48].7 | length 65.1
  Top Layer w0.127: IC5.21 41.858,47.752 45.92,51.814 v1(45.92,54.519)
  Bottom Layer w0.127: v1(45.92,54.519) 45.92,93.418 55.904,103.402 55.904,105.41
OUT40: IC5.22 OUT[33-48].8 | length 66.8
  Top Layer w0.127: IC5.22 41.862,46.482 46.446,51.066 v1(46.446,53.957)
  Bottom Layer w0.127: v1(46.446,53.957) 46.446,93.182 56.904,103.64 56.904,105.41
OUT41: IC6.15 OUT[33-48].9 | length 52.2
  Top Layer w0.127: IC6.15@55.04,55.379 56.72,55.379 57.749,56.408 v1(57.749,58.021)
  Bottom Layer w0.127: v1(57.749,58.021) 57.749,96.372 57.898,96.521 57.898,105.404
OUT42: IC6.16 OUT[33-48].10 | length 53.9
  Top Layer w0.127: IC6.16 56.702,54.102 58.275,55.675 v1(58.275,57.458)
  Bottom Layer w0.127: v1(58.275,57.458) 58.275,96.163 58.909,96.797 58.909,105.405
OUT43: IC6.17 OUT[33-48].11 | length 55.6
  Top Layer w0.127: IC6.17 55.045,52.843 56.716,52.843 58.801,54.928 v1(58.801,56.896)
  Bottom Layer w0.127: v1(58.801,56.896) 58.801,95.86 59.904,96.963 59.904,105.41
OUT44: IC6.18 OUT[33-48].12 | length 57.3
  Top Layer w0.127: IC6.18 56.702,51.562 59.327,54.187 v1(59.327,56.334)
  Bottom Layer w0.127: v1(59.327,56.334) 59.327,95.387 59.323,95.392 60.904,96.973 60.904,105.41
OUT45: IC6.19 OUT[33-48].13 | length 58.9
  Top Layer w0.127: IC6.19 56.709,50.292 59.853,53.436 v1(59.853,55.771)
  Bottom Layer w0.127: v1(59.853,55.771) 59.853,95.088 61.904,97.139 61.904,105.41
OUT46: IC6.20 OUT[33-48].14 | length 60.6
  Top Layer w0.127: IC6.20 56.711,49.022 60.379,52.691 v1(60.379,55.209)
  Bottom Layer w0.127: v1(60.379,55.209) 60.379,94.415 62.904,96.94 62.904,105.41
OUT47: IC6.21 OUT[33-48].15 | length 62.3
  Top Layer w0.127: IC6.21 56.713,47.752 60.906,51.945 v1(60.906,54.646)
  Bottom Layer w0.127: v1(60.906,54.646) 60.906,93.506 63.904,96.505 63.904,105.41
OUT48: IC6.22 OUT[33-48].16 | length 64
  Top Layer w0.127: IC6.22 56.703,46.482 61.432,51.211 v1(61.432,54.084)
  Bottom Layer w0.127: v1(61.432,54.084) 61.468,54.12 61.468,92.71 64.904,96.146 64.904,105.41
OUT49: IC7.15 OUT[49-64].1 | length 54.2
  Top Layer w0.127: IC7.15 71.501,55.372 72.481,56.352 v1(72.481,58.021)
  Bottom Layer w0.127: v1(72.481,58.021) 72.481,95.722 77.59,100.831 77.59,105.41
OUT50: IC7.16 OUT[49-64].2 | length 55.9
  Top Layer w0.127: IC7.16 71.501,54.102 73.007,55.608 v1(73.007,57.458)
  Bottom Layer w0.127: v1(73.007,57.458) 73.007,95.242 78.59,100.825 78.59,105.41
OUT51: IC7.17 OUT[49-64].3 | length 57.6
  Top Layer w0.127: IC7.17 71.482,52.832 73.533,54.883 v1(73.533,56.896)
  Bottom Layer w0.127: v1(73.533,56.896) 73.533,94.68 79.59,100.737 79.59,105.41
OUT52: IC7.18 OUT[49-64].4 | length 59.2
  Top Layer w0.127: IC7.18 71.469,51.562 74.059,54.152 v1(74.059,56.334)
  Bottom Layer w0.127: v1(74.059,56.334) 74.059,94.179 80.59,100.709 80.59,105.41
OUT53: IC7.19 OUT[49-64].5 | length 60.9
  Top Layer w0.127: IC7.19 71.495,50.292 74.585,53.382 v1(74.585,55.771)
  Bottom Layer w0.127: v1(74.585,55.771) 74.585,93.56 81.59,100.564 81.59,105.41
OUT54: IC7.20 OUT[49-64].6 | length 62.6
  Top Layer w0.127: IC7.20 71.501,49.022 75.111,52.632 v1(75.111,55.209)
  Bottom Layer w0.127: v1(75.111,55.209) 75.111,92.89 82.59,100.369 82.59,105.41
OUT55: IC7.21 OUT[49-64].7 | length 64.3
  Top Layer w0.127: IC7.21 71.501,47.752 75.638,51.889 v1(75.638,54.646)
  Bottom Layer w0.127: v1(75.638,54.646) 75.638,92.095 83.59,100.048 83.59,105.41
OUT56: IC7.22 OUT[49-64].8 | length 66
  Top Layer w0.127: IC7.22 71.472,46.482 76.164,51.174 v1(76.164,54.084)
  Bottom Layer w0.127: v1(76.164,54.084) 76.164,91.263 84.59,99.689 84.59,105.41
OUT57: IC8.15 OUT[49-64].9 | length 52.9
  Top Layer w0.127: IC8.15 86.36,55.372 87.394,56.406 v1(87.394,57.985)
  Bottom Layer w0.127: 85.59,105.41 85.59,100.084 87.394,98.28 v1(87.394,57.985)
OUT58: IC8.16 OUT[49-64].10 | length 54.2
  Top Layer w0.127: IC8.16 86.36,54.102 87.92,55.662 v1(87.92,57.422)
  Bottom Layer w0.127: 86.59,105.41 86.59,99.756 87.92,98.425 v1(87.92,57.422)
OUT59: IC8.17 OUT[49-64].11 | length 55.5
  Top Layer w0.127: IC8.17 86.36,52.832 88.446,54.918 v1(88.446,56.86)
  Bottom Layer w0.127: 87.59,105.41 87.59,99.366 88.441,98.515 88.441,91.207 88.446,91.201 v1(88.446,56.86)
OUT60: IC8.18 OUT[49-64].12 | length 56.8
  Top Layer w0.127: IC8.18 86.36,51.562 88.973,54.175 v1(88.973,56.297)
  Bottom Layer w0.127: 88.59,105.41 88.579,105.399 88.579,99.553 88.973,99.159 v1(88.973,56.297)
OUT61: IC8.19 OUT[49-64].13 | length 58.1
  Top Layer w0.127: IC8.19 86.36,50.292 89.499,53.431 v1(89.499,55.735)
  Bottom Layer w0.127: v1(89.499,55.735) 89.499,99.105 89.59,99.196 89.59,105.41
OUT62: IC8.20 OUT[49-64].14 | length 59.8
  Top Layer w0.127: IC8.20 86.36,49.022 90.025,52.687 v1(90.025,55.172)
  Bottom Layer w0.127: v1(90.025,55.172) 90.043,55.191 90.043,98.298 90.59,98.845 90.59,105.41
OUT63: IC8.21 OUT[49-64].15 | length 61.5
  Top Layer w0.127: IC8.21 86.36,47.752 90.551,51.943 v1(90.551,54.61)
  Bottom Layer w0.127: v1(90.551,54.61) 90.551,98.093 91.59,99.132 91.59,105.41
OUT64: IC8.22 OUT[49-64].16 | length 63.2
  Top Layer w0.127: IC8.22 86.36,46.482 91.077,51.199 v1@91.077,54.047
  Bottom Layer w0.127: v1(91.077,54.048) 91.077,97.808 92.59,99.321 92.59,105.41
POL: IC1.5 IC2.5 IC3.5 IC4.5 IC5.5 IC6.5 IC7.5 IC8.5 J2.5 | length 138.6
  Top Layer w0.127: IC4.5@40.598,77.766 v1(47.498,77.766) ; IC5.5@49.811,49.022 51.222,49.022 v1@51.434,49.234 ; v1@53.722,77.766 53.934,77.978 IC3.5@55.245,77.978 ; IC3.5@55.457,77.766 v1(62.357,77.766) ; IC6.5@64.543,49.022 65.954,49.022 v1@66.166,49.234 ; v1@68.581,77.766 68.793,77.978 IC2.5@70.104,77.978 ; IC2.5@70.316,77.766 v1(77.216,77.766) ; IC7.5@79.402,49.022 80.813,49.022 81.025,49.234 v1(81.153,49.234) ; v1(83.312,77.766) 83.44,77.766 83.652,77.978 IC1.5 85.175,77.766 v1(92.075,77.766) ; v1(92.075,49.276) 92.203,49.276 92.457,49.022 IC8.5 94.178,48.978 96.476,48.978 98.171,50.673 98.171,65.024 J2.5
  Bottom Layer w0.127: v1(47.498,77.766) v1(53.594,77.766) ; v1(51.562,49.234) v1(66.294,49.234) v1(81.153,49.234) 81.174,49.255 92.054,49.255 v1(92.075,49.276) ; v1(62.357,77.766) v1(68.453,77.766) ; v1(77.216,77.766) v1(83.312,77.766) ; v1(92.075,77.766) 92.126,77.716 92.972,77.716 97.663,73.025 98.044,73.025 98.053,73.034 100.829,73.034 101.555,72.308 101.555,68.408 J2.5
VPP: IC1.23 IC1.24 IC2.23 IC2.24 IC3.23 IC3.24 IC4.23 IC4.24 IC5.23 IC5.24 IC6.23 IC6.24 IC7.23 IC7.24 IC8.23 IC8.24 J1.6 | length 180.3
  Top Layer w0.127: v1(49.911,84.201) 49.911,83.084 IC4.24 ; IC4.23 IC4.24 ; v1(53.593,84.808) 64.212,84.808 v1(64.744,84.276) 64.744,83.077 IC3.24 IC3.23 ; IC6.23 IC6.24 ; v1(68.453,84.836) 79.072,84.836 v1(79.604,84.304) IC2.24@79.604,83.105 ; IC7.23 IC7.24 ; IC2.23 IC2.24 ; v1(83.185,84.836) 93.804,84.836 v1(94.336,84.304) IC1.24@94.336,83.105 ; IC8.23 IC8.24 82.804,43.942 81.28,42.418 73.787,42.418 72.263,43.942 IC7.24 ; IC1.23 94.324,81.877 94.324,82.969 IC1.24 ; IC4.24 44.45,83.058 41.529,85.979 32.766,85.979 31.623,84.836 31.623,72.136 J1.6 33.401,69.215 31.623,67.437 31.623,45.72 32.612,44.731 37.746,44.731 38.267,45.252 40.168,45.252 IC5.23 IC5.24 42.291,43.942 43.561,42.672 52.07,42.672 53.34,43.942 IC6.24 ; IC6.24 56.896,43.942 58.293,42.545 65.913,42.545 67.31,43.942 IC7.24
  Bottom Layer w0.127: v1(49.911,84.201) 50.518,84.808 v1(53.593,84.808) ; v1@64.771,84.229 65.378,84.836 v1(68.453,84.836) ; v1@79.503,84.229 80.11,84.836 v1(83.185,84.836)
pads on no net: IC1.1 IC1.8 IC1.9 IC1.12 IC2.1 IC2.8 IC2.9 IC2.12 IC3.1 IC3.8 IC3.9 IC3.12 IC4.1 IC4.8 IC4.9 IC4.12 IC5.1 IC5.8 IC5.9 IC5.12 IC6.1 IC6.8 IC6.9 IC6.12 IC7.1 IC7.8 IC7.9 IC7.12 IC8.1 IC8.8 IC8.9 IC8.12 J1.1 J1.2 J1.11 J1.12 J2.1 J2.2 J2.8 J2.9 J2.11 J2.12 J3.1 J3.2 J3.4 J3.5 J4.1 J4.2 J4.3 J4.4 J4.5 OUT[1-16].MP1 OUT[1-16].MP2 OUT[17-32].MP1 OUT[17-32].MP2 OUT[33-48].MP1 OUT[33-48].MP2 OUT[49-64].MP1 OUT[49-64].MP2

## Polygon pours and split planes (outlines as drawn)
GND on Top Layer "GND_L01_P000" (solid, pour order 0): 106.553,110.109 107.569,109.093 107.569,26.162 106.68,25.273 27.559,25.273 25.019,27.813 25.019,110.109
GND on Bottom Layer "GND_L02_P001" (solid, pour order 1): 24.765,110.236 25.019,109.982 108.077,109.982 108.204,109.855 108.204,27.813 105.664,25.273 26.162,25.273 24.638,26.797 24.638,109.982

## Silkscreen, mask and mechanical layers (free items; w line width, h text height)
Top Overlay:
  drawing of 18 lines, arcs and shapes, not listed
  text "17" at 65.913,102.616 h1.52
  text "1" at 93.345,102.616 h1.52
  text "Switching Board" at 79.527,90.534 h1.02
  text "NC" at 30.697,80.896 h1.52
  text "GND" at 32.893,76.581 h1.52 r90
  text "+3.3V" at 28.346,73.685 h1.02
  text "NC" at 101.465,73.279 h1.52
  text "LE" at 101.498,71.145 h1.02
  text "+5V" at 30.191,71.045 h1.02
  text "CLK" at 101.498,68.732 h1.02
  text "VPP" at 30.205,68.563 h1.02
  text "POL" at 101.498,66.192 h1.02
  text "GND" at 32.935,63.798 h1.52 r90
  text "BL" at 101.498,63.779 h1.02
  text "Connect this only on the PCB" at 73.508,63.381 h1.52
  text "immediate to the control PCB" at 73.513,62.116 h1.52
  text "+5V" at 30.124,60.985 h1.02
  text "NC" at 101.436,55.496 h1.52
  text "NC" at 30.57,55.369 h1.52
  text "NC" at 30.57,45.082 h1.52
  text "STK" at 29.997,42.951 h1.02
  text "NC" at 30.57,37.273 h1.52
  text "NC" at 101.33,36.957 h1.52
  text "Extention Board" at 63.119,32.639 h1.52
  text "DIN" at 94.539,31.318 h1.52 r90
  text "DOUT" at 97.151,31.289 h1.52 r90
  text "16-64 Electrodes" at 62.738,30.099 h1.52
Bottom Overlay:
  text "33" at 49.403,102.616 h1.52
  text "49" at 77.089,102.489 h1.52
Mechanical 1:
  lines w0.1: 41.867,44.241 41.867,59.735
  lines w0.254: 25.392,31.25 ccw(c31.242,31.25) 31.242,25.4 ; 25.4,30.988 25.4,104.14 ; 25.415,103.903 cw(c31.264,103.903) 31.264,109.752 ; 30.607,25.4 33.909,25.4 ccw(c33.909,28.067) 36.576,28.067 36.576,32.512 cw(c38.735,32.512) 38.735,34.671 57.531,34.671 ; 31.098,109.754 92.312,109.754 ; 57.277,34.671 cw(c57.277,32.512) 59.436,32.512 ; 59.436,28.067 59.436,32.766 ; 59.444,28.059 ccw(c62.111,28.059) 62.111,25.392 62.103,25.4 101.712,25.4 ; 91.964,109.752 101.981,109.752 ; 101.719,25.392 ccw(c101.719,31.242) 107.569,31.242 107.569,104.013 ; 101.726,109.748 cw(c101.726,103.899) 107.576,103.899